# Altium PCB HSD_Eval_Board.PcbDoc
Units mm, origin at the board's own origin, x right, y up, seen from the top; angles counter-clockwise.
Board outline 57.2 x 36.96 mm, 2 copper layers (Top Layer, Bottom Layer); 30 components, 24 nets, 91 pads, 28 vias.
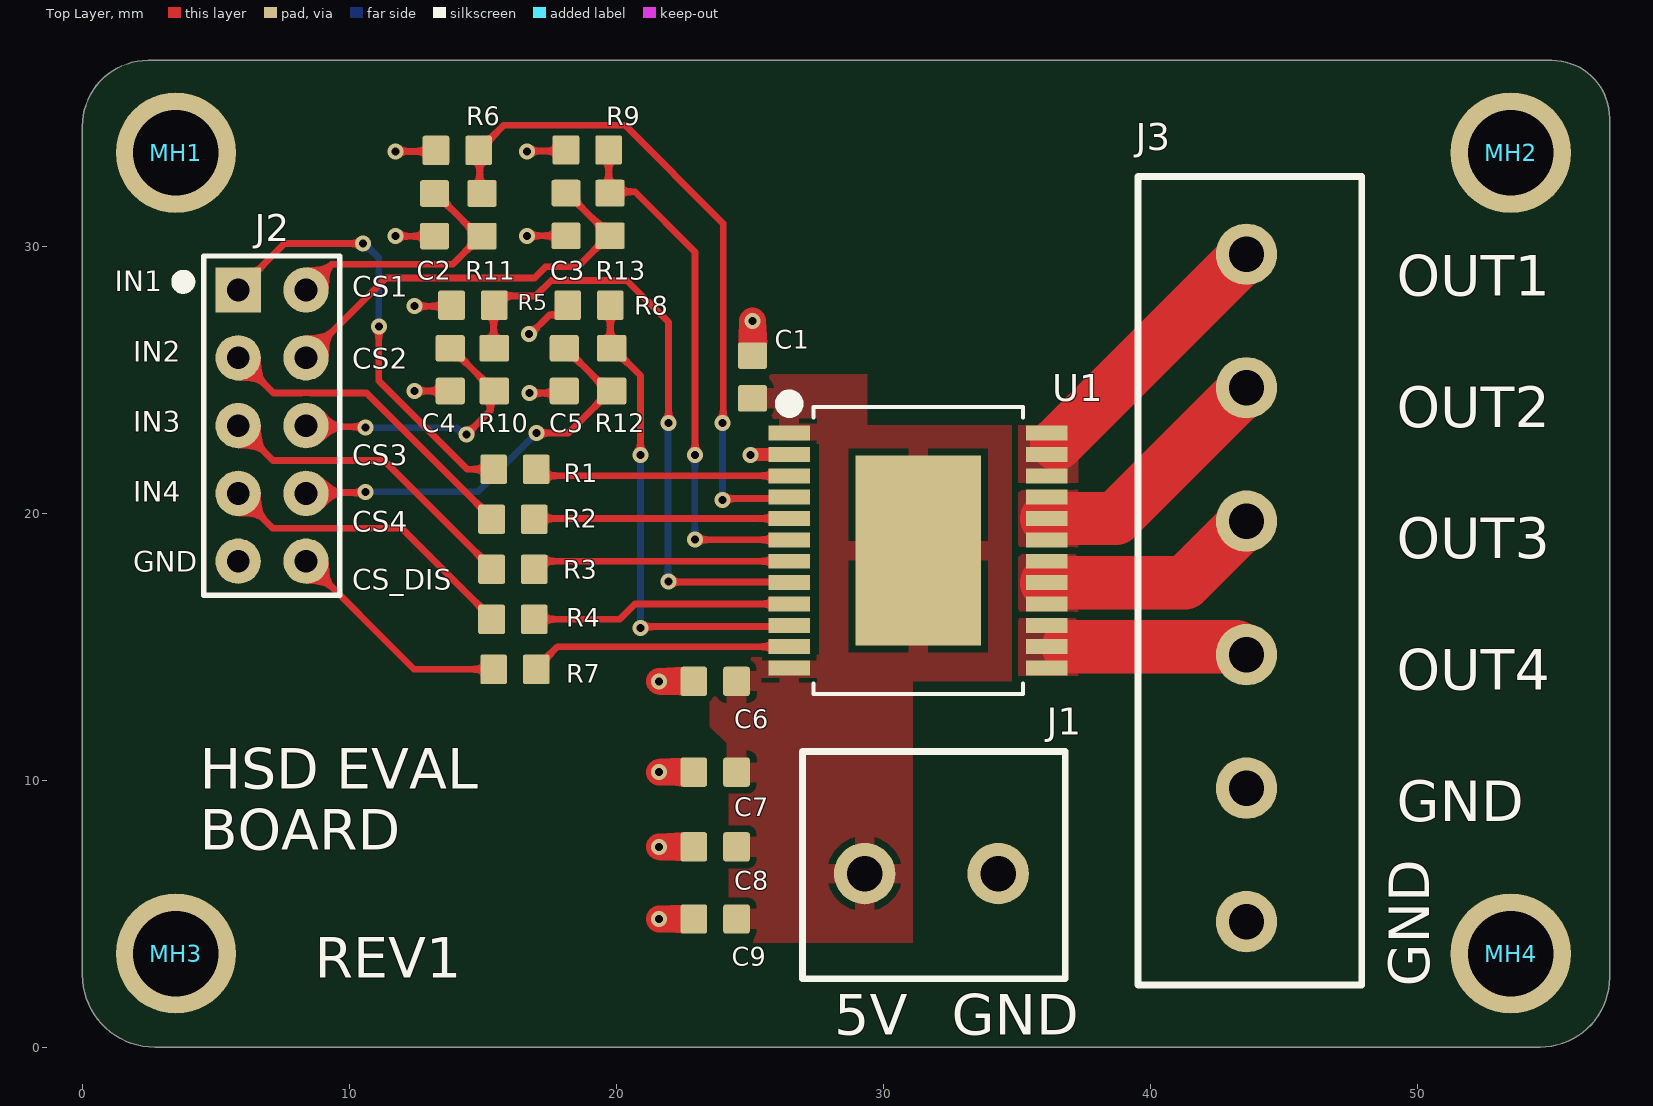
[diagram p0: Top Layer view]
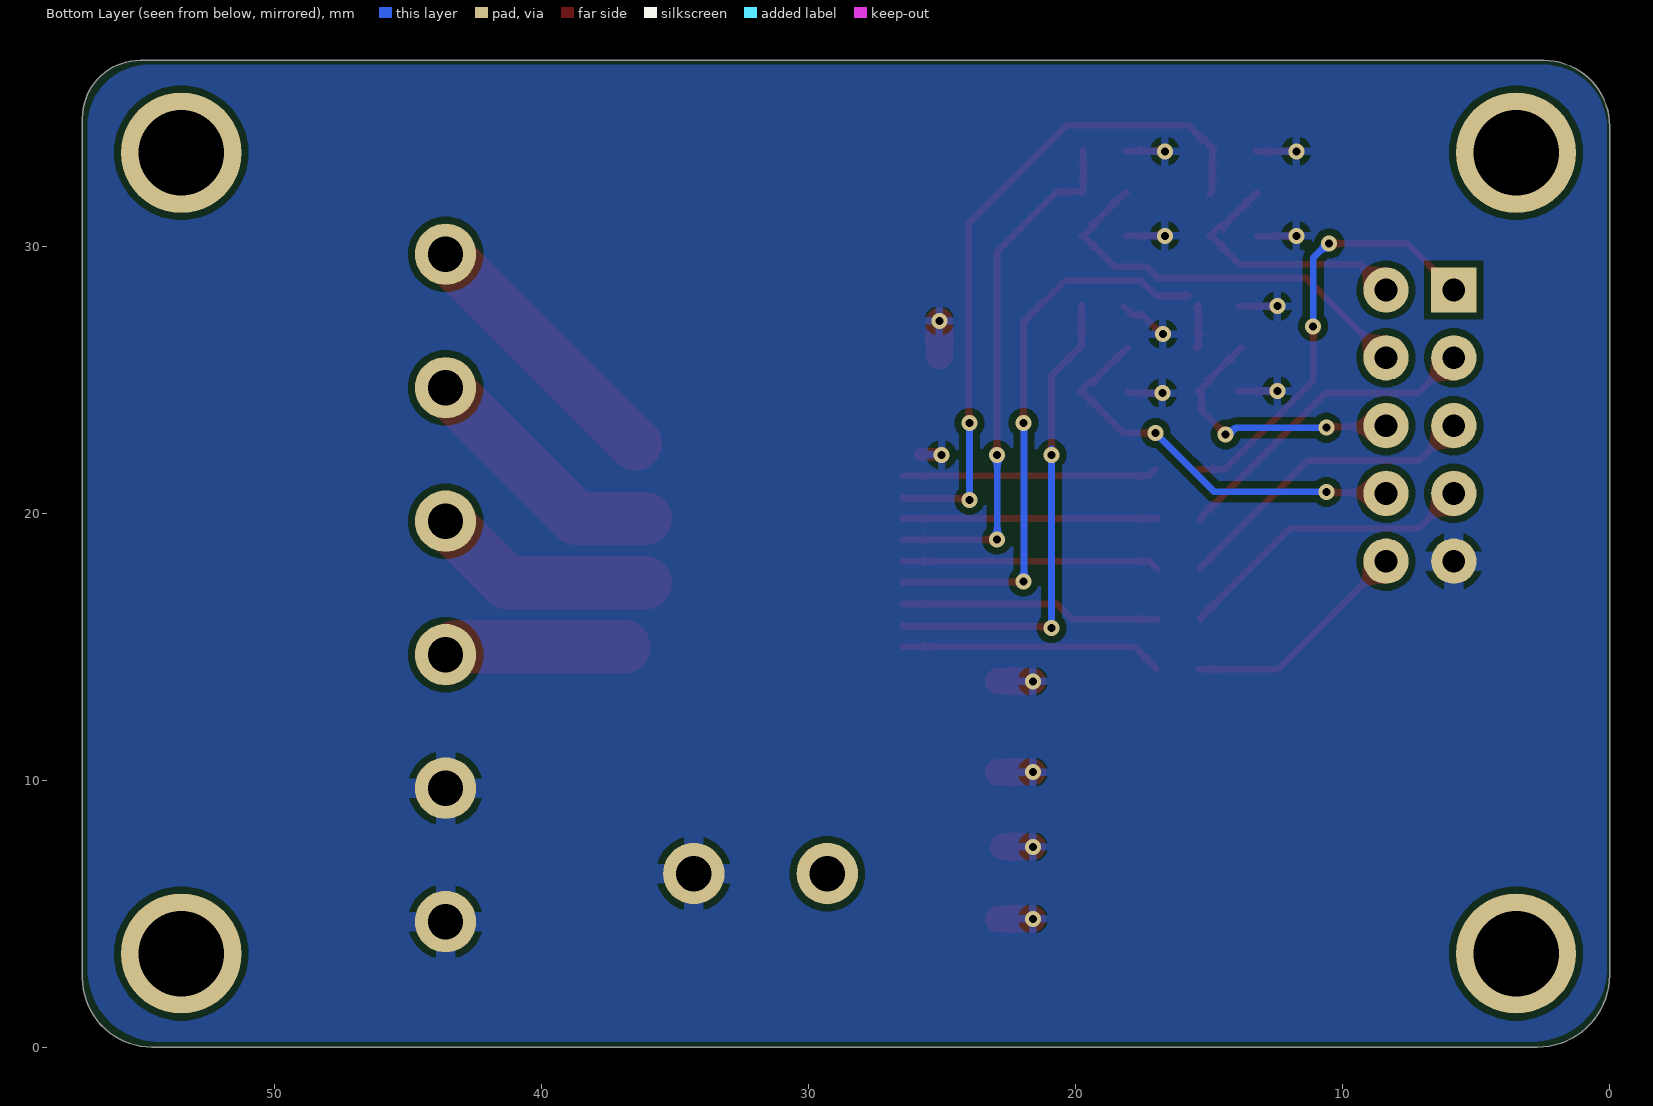
[diagram p1: Bottom Layer view, seen from below]
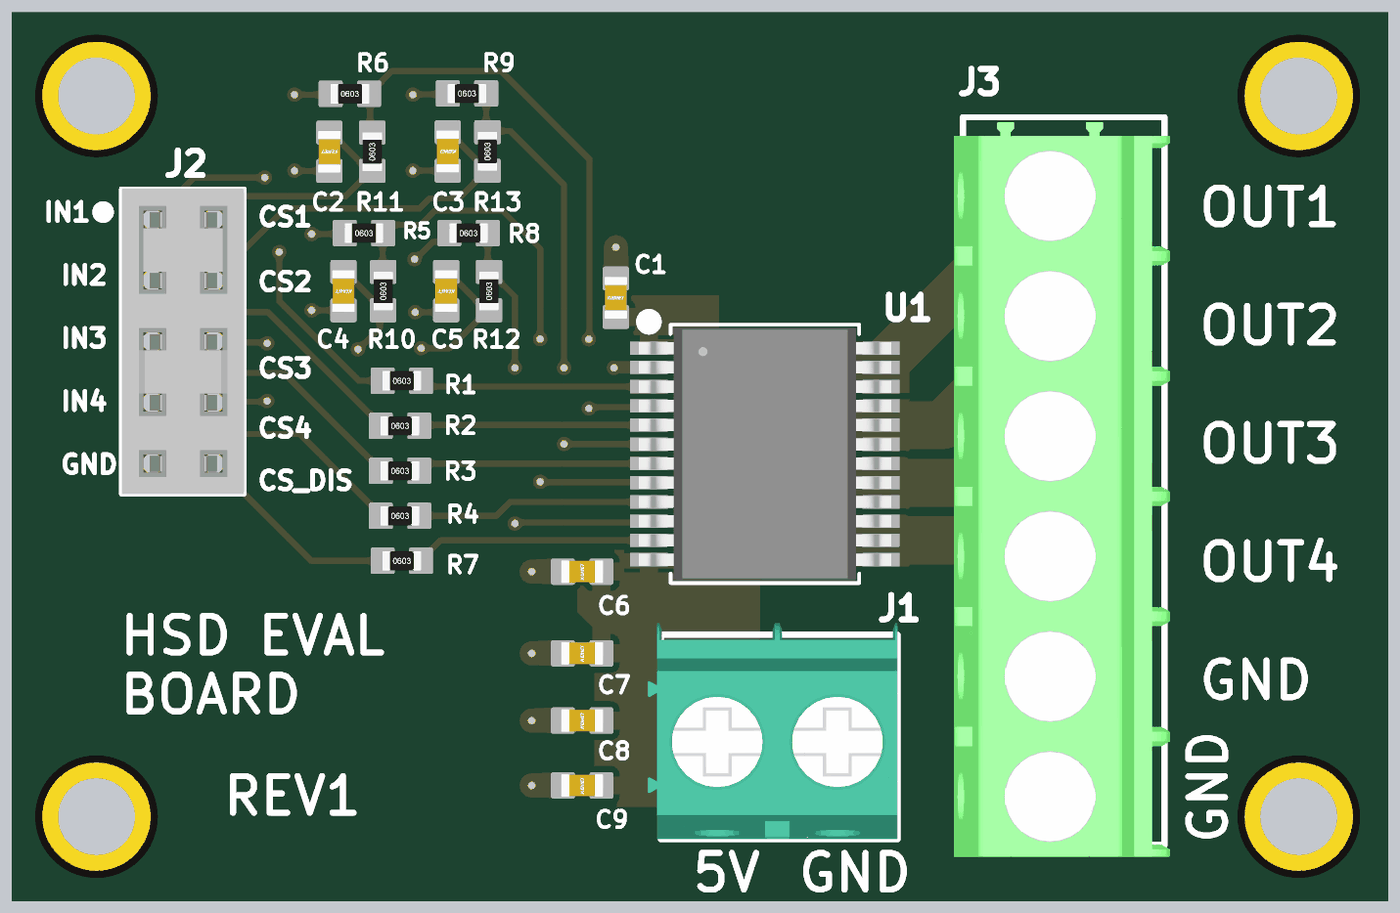
[diagram p2: 3D render of the assembled board from above, using the file's embedded part models]

## Layer stack, top to bottom
Top Solder: solder mask 0.0102, Solder Resist, Dk 3.5
Top Layer: signal copper 0.0356
Dielectric 1: dielectric 0.32, FR-4, Dk 4.8
Bottom Layer: signal copper 0.0356
Bottom Solder: solder mask 0.0102, Solder Resist, Dk 3.5

## Board outline
2.7,0 54.6,0 ccw(c54.6,2.6) 57.2,2.6 57.2,34.8 ccw(c55.043,34.8) 55.043,36.957 2.457,36.957 ccw(c2.457,34.5) 0,34.5 0,2.7 ccw(c2.7,2.7)

## Design rules (kind name [scope] priority, off if disabled: settings)
Clearance [All] p1: gap=0.254 ignorepadtopadclearanceinfootprint=TRUE except(0: Arc-Hole Track-Hole SMDPad-Hole THPad-Hole Via-Hole Fill-Hole Poly-Hole Region-Hole Text-Hole)
HoleSize [All] p1: absolutevalues=TRUE maxlimit=3.5 minlimit=0.025 maxpercent=80.000 minpercent=20.000
MinimumSolderMaskSliver [All] p1: minsoldermaskwidth=0.24
PlaneConnect [All] p1: planeconnectstyle=Direct reliefexpansion=0.508 reliefentries=4 reliefconductorwidth=0.254 reliefairgap=0.254
PolygonConnect "5V and Gnd Polygon" [InNet('5V0') or InNet('GND')] p1: thpad.connectstyle=Relief thpad.reliefconductorwidth=0.75 thpad.reliefentries=4 thpad.polygonreliefangle="90 Angle" thpad.airgapwidth=0.254 smdpad.connectstyle=Relief smdpad.reliefconductorwidth=0.75 smdpad.reliefentries=4 smdpad.polygonreliefangle="90 Angle" smdpad.airgapwidth=0.254 via.connectstyle=Relief via.reliefconductorwidth=0.3 via.reliefentries=4 via.polygonreliefangle="90 Angle" via.airgapwidth=0.254 // Want Thermal Reliefs
PolygonConnect [All] p2: connectstyle=Direct reliefconductorwidth=0.45 reliefentries=4 polygonreliefangle="90 Angle" airgapwidth=0.254
RoutingVias [All] p1: holewidth=0.711 width=1.27 viastyle="Through Hole" minholewidth=0.711 minwidth=1.27 maxholewidth=0.711 maxwidth=1.27
SolderMaskExpansion [All] p1: expansion=0.102 istentingtop=TRUE
Width [All] p1: maxlimit=3 minlimit=0.254 preferedwidth=0.254
27 further rules are at their usual default settings.

## Components (designator, comment, footprint, x,y, rotation, side; value= is the part's Value field where it differs from the comment)
C1 "CAP_0.01uF_100V_0603" CAP0603 25.1,25.1 r270 top value=0.01μF
C2 "CAP_0.01uF_100V_0603" CAP0603 13.188,31.176 r90 top value=0.01μF
C3 "CAP_0.01uF_100V_0603" CAP0603 18.11,31.189 r90 top value=0.01μF
C4 "CAP_0.01uF_100V_0603" CAP0603 13.773,25.376 r90 top value=0.01μF
C5 "CAP_0.01uF_100V_0603" CAP0603 18.046,25.376 r90 top value=0.01μF
C6 "CAP_0.01uF_100V_0603" CAP0603 23.7,13.7 r0 top value=0.01μF
C7 "CAP_10uF_10V_0603" CAP0603 23.7,10.3 r0 top value=10μF
C8 "CAP_10uF_10V_0603" CAP0603 23.7,7.5 r0 top value=10μF
C9 "CAP_10uF_10V_0603" CAP0603 23.7,4.8 r0 top value=10μF
J1 "CON_2M_TERM" 1935161 31.8,6.5 r180 top
J2 "HEADER 5x2" "HEADER 2X5" 7.103,23.28 r0 top
J3 "CON_6POS_SCREW_TERM" 1935200 43.6,29.7 r270 top
MH1 "MOUNTING_HOLE_M3" MOUNTING_HOLE_3mm#1 3.1,33.7 r0 top
MH2 "MOUNTING_HOLE_M3" MOUNTING_HOLE_3mm#2 52,33.5 r0 top
MH3 "MOUNTING_HOLE_M3" MOUNTING_HOLE_3mm#3 3.3,2.9 r0 top
MH4 "MOUNTING_HOLE_M3" MOUNTING_HOLE_3mm#4 53.1,3 r0 top
R1 "RES_10kΩ_0603_5%" RESC0603 15.4,21.643 r0 top value=10kΩ
R2 "RES_10kΩ_0603_5%" RESC0603 15.324,19.77 r0 top value=10kΩ
R3 "RES_10kΩ_0603_5%" RESC0603 15.324,17.897 r0 top value=10kΩ
R4 "RES_10kΩ_0603_5%" RESC0603 15.324,16.023 r0 top value=10kΩ
R5 "RES_10kΩ_0603_5%" RESC0603 14.966,30.376 r90 top value=10kΩ
R6 "RES_220Ω_0603" RESC0603 13.239,33.589 r0 top value=220Ω
R7 "RES_10kΩ_0603_5%" RESC0603 15.4,14.15 r0 top value=10kΩ
R8 "RES_10kΩ_0603_5%" RESC0603 19.761,30.389 r90 top value=10kΩ
R9 "RES_220Ω_0603" RESC0603 18.11,33.602 r0 top value=220Ω
R10 "RES_10kΩ_0603_5%" RESC0603 15.424,24.576 r90 top value=10kΩ
R11 "RES_220Ω_0603" RESC0603 13.824,27.789 r0 top value=220Ω
R12 "RES_10kΩ_0603_5%" RESC0603 19.824,24.576 r90 top value=10kΩ
R13 "RES_220Ω_0603" RESC0603 18.173,27.789 r0 top value=220Ω
U1 "VNQ5E160AK-E" PowerSSO-24_STM 31.3,18.6 r0 top

## Footprints (in the part's own frame and the unit in brackets; to place one, negate y for a bottom-side part, rotate by r counter-clockwise, add the part's x,y. Pads: shape width x height; smd on the part's side, far side on the other; paste and mask are expansions set on the pad)
1935161 [mm] "TERM BLK 2POS SIDE ENTRY 5MM PCB"
  round 2.3 hole 1.325: 1(-2.5,0) 2(2.5,0)
  silkscreen extent -5.01,-4.57 4.83,3.94, body extent -5.01,-5.06 5.39,3.94, height 11.41
1935200 [mm]
  round 2.3 hole 1.325: 1(0,0) 2(5,0) 3(10,0) 4(15,0) 5(20,0) 6(25,0)
  silkscreen extent -2.91,-4.06 27.37,4.32, body extent -2.71,-4.45 27.86,4.55, height 11.41
CAP0603 [mm]
  rrect20% 1x1.1 smd: 1(-0.8,0) 2(0.8,0)
  body extent -0.87,-0.48 0.88,0.48, height 0.87
"HEADER 2X5" [mm] "CONN HEADER VERT 10POS 2.54MM"
  rect 1.7x1.7 hole 0.85: 1(-1.27,5.08)
  round 1.7 hole 0.85: 2(-1.27,2.54) 3(-1.27,0) 4(-1.27,-2.54) 5(-1.27,-5.08) 6(1.27,5.08) 7(1.27,2.54) 8(1.27,0) 9(1.27,-2.54) 10(1.27,-5.08)
  silkscreen extent -3.53,-6.35 2.54,6.35, body extent -2.54,-6.35 2.54,6.35, height 8.51
MOUNTING_HOLE_3mm#1 [mm] "3mm Hole"
  round 4.5 hole 3.2 mask+0.3: 0(0.4,-0.2)
MOUNTING_HOLE_3mm#2 [mm] "3mm Hole"
  round 4.5 hole 3.2 mask+0.3: 0(1.5,0)
MOUNTING_HOLE_3mm#3 [mm] "3mm Hole"
  round 4.5 hole 3.2 mask+0.3: 0(0.2,0.6)
MOUNTING_HOLE_3mm#4 [mm] "3mm Hole"
  round 4.5 hole 3.2 mask+0.3: 0(0.4,0.5)
PowerSSO-24_STM [mil] "Power Switch/Driver 1:1 N-Channel 13.5A PowerSSO-24"
  rect 61x22 smd paste+0 mask+0: 1(-190,173.23) 2(-190,141.73) 3(-190,110.24) 4(-190,78.74) 5(-190,47.24) 6(-190,15.75) 7(-190,-15.75) 8(-190,-47.24) 9(-190,-78.74) 10(-190,-110.24) 11(-190,-141.73) 12(-190,-173.23) 13(190,-173.23) 14(190,-141.73) 15(190,-110.24) 16(190,-78.74) 17(190,-47.24) 18(190,-15.75) 19(190,15.75) 20(190,47.24) 21(190,78.74) 22(190,110.24) 23(190,141.73) 24(190,173.23)
  rect 185x280 smd paste-139.5 mask+0: EPAD(0,0)
  silkscreen extent -200,-212 154,226, body extent -207,-206 207,207, height 96
RESC0603 [mm] "Chip Resistor, Body 1.6x0.8mm, IPC Medium Density"
  rrect15% 1x1.1 smd: 1(0,0) 2(1.6,0)
  body extent 0,-0.4 1.6,0.4, height 0.46

## Part data
C1 C2 C3 C4 C5 C6: "CAP CER 10000PF 100V X7R 0603", Dielectric=X7R, Manufacturer 1="Murata Electronics", Manufacturer Part Number 1=GCM188R72A103KA37J, Supplier Part Number 1=490-8028-1-ND, Voltage Rating=100V, Supplier 1=Digi-Key
C7 C8 C9: "CAP CER 10UF 10V X5R 0603", Dielectric=X5R, Manufacturer 1=Yageo, Manufacturer Part Number 1=CC0603MRX5R6BB106, Supplier Part Number 1=311-1817-1-ND, Voltage Rating=10V, Supplier 1=Digi-Key
J1: "TERM BLK 2POS SIDE ENTRY 5MM", Current=18A, Manufacturer 1="Phoenix Contact", Manufacturer Part Number 1=1935161, Max Current Rating=16A, Package/Footprint=SMD, Supplier Part Number 1=277-1667-ND, Voltage=300V, Mounting Type=TH, Supplier 1=Digi-Key
J2: "CONN HEADER VERT 10POS 2.54MM", Color=Black, Manufacturer 1=Molex, Manufacturer Part Number 1=0901512210, Max Operating Temperature=125°C, Min Operating Temperature=-55°C, Supplier Part Number 1=WM4240-ND, Category="Headers and Wire Housings", ComponentLink1Description=https://datasheet.ciiva.com/755/901512210-sd-755814.pdf?src-supplier=Digi-Key, ComponentLink1URL=https://datasheet.ciiva.com/755/901512210-sd-755814.pdf?src-supplier=Digi-Key, Connector Type=Receptacle, Contact Material=Bronze, Contact Plating=Gold, Contact Type="Female Socket", Depth=5.08mm, Housing Color=Black, Housing Material=Polyester, Length=12.7mm, Mount="Through Hole", Number of Contacts=10, Number of Positions=10, Number of Rows=2, Orientation=Straight, Packaging=Rail/Tube, Pitch=0.1inch, RoHS Compliant=Yes, Row Spacing=0.1inch, Series="C-Grid III™ 90151", Stock 1=3613, Supplier 1=Digi-Key, Termination=Solder, Verified=No
J3: "TERM BLK 6POS SIDE ENTRY 5MM", Manufacturer 1="Phoenix Contact", Manufacturer Part Number 1=1935200, Package/Footprint=TH, Supplier Part Number 1=277-1581-ND, Mounting Type=TH, Pitch=5mm, Screw Thread=M2.6, Supplier 1=Digi-Key, Wire Gauge=12-26AWG
R1 R2 R3 R4 R5 R7 R8 R10 R12: "RES 10K OHM 5% 1/10W 0603", Manufacturer 1=Yageo, Manufacturer Part Number 1=RC0603JR-0710KL, Package/Footprint=0603, Supplier Part Number 1=311-10KGRCT-ND, Mounting Type=SMD, Supplier 1=Digi-Key
R6 R9 R11 R13: library part RES_220Ω_0603_5%, "RES 220 OHM 5% 1/10W 0603", Manufacturer 1=Yageo, Manufacturer Part Number 1=AC0603JR-07220RL, Supplier Part Number 1=YAG3652CT-ND, Supplier 1=Digi-Key
U1: "Power Switch/Driver 1:1 N-Channel 7A PowerSSO-24", Load Voltage="4.5V ~ 28V", Manufacturer 1=STMicroelectronics, Max Operating Temperature=150°C, Max Output Current=10A, Min Operating Temperature=-40°C, On-State Resistance=160mR, Output Current per Channel=7A, Supplier Part Number 1=497-19256-ND, Category="Hot Swap Controllers", ComponentLink1Description=https://datasheet.ciiva.com/1956/cd00163285-1956669.pdf?src-supplier=Digi-Key, ComponentLink1URL=https://datasheet.ciiva.com/1956/cd00163285-1956669.pdf?src-supplier=Digi-Key, Lead Free="Lead Free", Manufacturer Part Number 1=VNQ5E160AK-E, Mounting Type=SM, Number of Outputs=4, Number of Pins=24, Output Configuration="High Side", Rds On (Typ)="160mOhm (Max)", Series=VIPower™, Supplier 1=Digi-Key, Verified=No

## Via types
v1: diameter 0.6, hole 0.3, Top Layer to Bottom Layer, tented both sides, 28 vias

## Nets (pads, with @x,y where several pads share a name; then routed paths per layer and width w, separated by ;. In a path a pad name is that pad's centre, name@x,y a point inside that pad or via, vN(x,y) a via of type N, cw(c..) or ccw(c..) an arc to the next point about the centre after c; other vN are vias at no path point)
5V0: C1.2 C6.2 C7.2 C8.2 C9.2 J1.2 U1.1 U1.12 U1.EPAD
GND: C1.1 C2.1 C3.1 C4.1 C5.1 C6.1 C7.1 C8.1 C9.1 J1.1 J2.5 J3.5 J3.6 R6.1 R9.1 R11.1 R13.1 U1.2 | length 19.1
  Top Layer w0.254: v1@11.734,30.376 C2.1 ; v1(11.734,33.551) R6.1@13.188,33.551 ; v1(12.446,24.576) C4.1 C4.1@13.9,24.576 ; v1(12.446,27.751) R11.1@13.9,27.751 ; R6.1@13.188,33.538 R6.1 ; v1(16.656,30.389) C3.1 ; v1@16.656,33.564 R9.1@18.11,33.564 ; v1(16.752,24.498) 17.968,24.498 C5.1 ; v1@16.755,26.683 17.498,27.427 17.861,27.427 R13.1@18.185,27.751 ; v1(25.022,22.182) v1@25.04,22.2
  Top Layer w0.5: v1@25.04,22.2 U1.2@25.8,22.2
  Top Layer w1: v1(21.6,4.8) C9.1 ; v1(21.6,7.5) C8.1@22.7,7.5 ; v1(21.6,10.3) C7.1 ; v1(21.6,13.7) C6.1 ; C1.1 v1(25.1,27.2)
  other v1: 16.729,26.706 11.734,30.389 16.656,33.551
HSD_CS1: C2.2 J2.6 R5.1 | length 9.9
  Top Layer w0.254: J2.6 9.333,29.32 13.86,29.32 14.916,30.376 R5.1 14.593,30.749 14.465,30.749 13.238,31.976 C2.2
HSD_CS2: C3.2 J2.7 R8.1 | length 15.6
  Top Layer w0.254: J2.7 11.365,28.812 16.933,28.812 17.349,29.228 18.549,29.228 R8.1@19.711,30.389 ; C3.2 18.16,31.989 19.338,30.811 19.338,30.762 R8.1@19.711,30.389 ; R8.1 R8.1@19.711,30.389
HSD_CS3: C4.2 J2.8 R10.1 | length 10.5
  Top Layer w0.254: J2.8 8.413,23.24 10.56,23.24 v1(10.6,23.2) ; C4.2 13.823,26.176 15.001,24.998 15.001,24.949 R10.1@15.374,24.576 ; v1@14.466,23.029 15.281,23.844 15.281,24.483 R10.1@15.374,24.576 ; R10.1 R10.1@15.374,24.576
  Bottom Layer w0.254: v1@10.592,23.2 v1(10.6,23.2) 14,23.2 v1@14.4,22.8
  other v1: 14.376,22.951
HSD_CS4: C5.2 J2.9 R12.1 | length 15.5
  Top Layer w0.254: J2.9 8.403,20.77 10.57,20.77 v1(10.6,20.8) ; v1(17,23) 18.198,23 19.774,24.576 R12.1 19.451,24.949 19.323,24.949 18.096,26.176 C5.2
  Bottom Layer w0.254: v1(10.6,20.8) 14.8,20.8 v1(17,23)
HSD_CS_DIS: J2.10 R7.1 | length 8.7
  Top Layer w0.254: J2.10 12.42,14.153 15.397,14.153 R7.1
HSD_IN1: J2.1 R1.1 | length 16.5
  Top Layer w0.254: J2.1 7.573,30.1 v1(10.5,30.1) ; v1(11.1,27) 11.1,24.959 14.416,21.643 R1.1
  Bottom Layer w0.254: v1(10.5,30.1) 10.557,30.1 11.1,29.557 v1(11.1,27)
HSD_IN2: J2.2 R2.1 | length 12
  Top Layer w0.254: J2.2 7.079,24.574 7.153,24.5 8.209,24.5 cw(c8.373,23.28) 8.537,24.5 10.644,24.5 10.718,24.426 15.324,19.82 R2.1
HSD_IN3: J2.3 R3.1 | length 11.8
  Top Layer w0.254: J2.3 7.142,21.971 11.3,21.971 15.324,17.947 R3.1
HSD_IN4: J2.4 R4.1 | length 11.5
  Top Layer w0.254: J2.4 7.142,19.431 11.966,19.431 15.324,16.073 R4.1
HSD_OUT1: J3.1 U1.22 U1.23 U1.24 | length 10.9
  Top Layer w0.254: U1.23 U1.23@36.621,22.2 ; J3.1@43.6,29.179 J3.1
  Top Layer w2: 36.5,22.6 J3.1@43.479,29.579
HSD_OUT2: J3.2 U1.19 U1.20 U1.21 | length 9.5
  Top Layer w2: U1.20 38.7,19.8 J3.2
HSD_OUT3: J3.3 U1.16 U1.17 U1.18 | length 8.4
  Top Layer w2: U1.17 41.3,17.4 J3.3
HSD_OUT4: J3.4 U1.13 U1.14 U1.15 | length 7
  Top Layer w0.254: U1.14 U1.14@36.266,14.86
  Top Layer w2: 36.926,15 43.219,15 43.519,14.7 J3.4
NetR1_2: R1.2 U1.3 | length 9.6
  Top Layer w0.254: R1.2 17.243,21.4 U1.3
NetR2_2: R2.2 U1.5 | length 9.6
  Top Layer w0.254: R2.2 16.954,19.8 U1.5
NetR3_2: R3.2 U1.7 | length 9.7
  Top Layer w0.254: R3.2 R3.2@17.224,18.197 ; R3.2@17.224,18.2 U1.7
NetR4_2: R4.2 U1.9 | length 9.8
  Top Layer w0.254: R4.2 20.123,16.023 20.7,16.6 U1.9
NetR5_2: R5.2 R6.2 U1.4 | length 25.7
  Top Layer w0.254: R5.2 14.878,32.064 14.878,33.55 R6.2 14.839,33.639 15.212,34.012 15.262,34.012 15.783,34.533 20.323,34.533 24,30.857 24,23.402 v1(23.975,23.377) ; v1(23.975,20.495) 24.027,20.547 26.421,20.547 U1.4
  Bottom Layer w0.254: v1@23.959,23.351 23.975,23.336 v1(23.975,20.495)
NetR7_2: R7.2 U1.11 | length 9.9
  Top Layer w0.254: R7.2 17,14.2 17.8,15 U1.11
NetR8_2: R8.2 R9.2 U1.6 | length 20.1
  Top Layer w0.254: R9.2 R8.2@19.71,32.04 ; R8.2 R8.2@19.71,32.04 ; v1@22.92,19.012 22.926,19.006 26.468,19.006 U1.6 ; v1@22.945,22.271 22.945,29.787 20.692,32.04 R8.2@19.71,32.04
  Bottom Layer w0.254: v1@22.92,19.012 22.932,19.025 22.932,22.258 v1@22.945,22.271
  other v1: 22.945,19.012 22.945,22.182
NetR10_2: R10.2 R11.2 U1.8 | length 23.1
  Top Layer w0.254: R10.2@15.4,26.2 R11.2@15.4,27.661 ; R10.2 R10.2@15.5,26.252 ; R11.2 R11.2@15.5,27.713 ; R11.2@15.772,28.148 15.783,28.137 16.976,28.137 17.559,28.72 20.387,28.72 21.952,27.155 v1(21.952,23.382) ; v1@21.912,17.439 21.931,17.419 26.455,17.419 U1.8
  Bottom Layer w0.254: v1@21.912,17.439 21.932,17.459 21.932,23.362 v1(21.952,23.382)
  other v1: 21.952,17.439
NetR12_2: R12.2 R13.2 U1.10 | length 18.2
  Top Layer w0.254: R13.2@19.774,27.788 19.774,26.227 R12.2 ; R12.2@19.849,26.201 20.9,25.15 20.9,23.088 v1@20.9,22.4 ; v1(20.9,15.7) 20.95,15.75 26.424,15.75 U1.10
  Bottom Layer w0.254: v1(20.9,15.7) v1@20.9,22.4
  other v1: 20.9,22.182
pads on no net: MH1.0 MH2.0 MH3.0 MH4.0

## Polygon pours and split planes (outlines as drawn)
5V0 on Top Layer "5V - TOP LAYER" (solid, remove dead copper, pour order 0): 31.1,3.9 31.1,13.7 34.8,13.7 34.8,23.3 29.4,23.3 29.4,25.2 24.2,25.2 24.2,22.6 25.6,22.6 27.6,22.6 27.6,14.7 23.5,14.7 23.5,12 24.2,11.3 24.2,3.9
HSD_OUT4 on Top Layer "HSD_OUT4" (solid, remove dead copper, pour order 9): 35.005,13.916 35.005,16.075 37.305,16.075 37.305,13.916
HSD_OUT3 on Top Layer "HSD_OUT3" (solid, remove dead copper, pour order 8): 35.005,16.316 35.005,18.475 37.305,18.475 37.305,16.316
HSD_OUT2 on Top Layer "HSD_OUT2" (solid, remove dead copper, pour order 7): 35.005,18.716 35.005,20.875 37.305,20.875 37.305,18.716
HSD_OUT1 on Top Layer "HSD_OUT1" (solid, remove dead copper, pour order 1): 35,21.142 35,23.3 37.3,23.3 37.3,21.142
GND on Bottom Layer "GND - TOP LAYER" (solid, remove dead copper, pour order 3): 2.5,36.8 54.7,36.8 cw(c54.7,34.504) 56.996,34.504 56.996,2.896 cw(c54.3,2.896) 54.3,0.2 2.9,0.2 cw(c2.9,3) 0.1,3 0.1,34.4 cw(c2.5,34.4)

## Silkscreen, mask and mechanical layers (free items; w line width, h text height)
Top Overlay:
  text "IN1" at 1.203,28.303 h0.76
  text "OUT1" at 49.228,28.148 h1.52
  text "CS1" at 10.103,28.103 h0.76
  text "IN2" at 1.903,25.678 h0.76
  text "CS2" at 10.103,25.403 h0.76
  text "OUT2" at 49.228,23.227 h1.52
  text "IN3" at 1.903,23.053 h0.76
  text "CS3" at 10.103,21.803 h0.76
  text "IN4" at 1.903,20.428 h0.76
  text "CS4" at 10.103,19.303 h0.76
  text "OUT3" at 49.228,18.306 h1.52
  text "GND" at 1.903,17.803 h0.76
  text "CS_DIS" at 10.103,17.13 h0.76
  text "OUT4" at 49.228,13.384 h1.52
  text "GND" at 49.228,8.463 h1.52
  text "HSD EVAL  / BOARD" at 4.4,7.4 h1.52
  text "REV1" at 8.7,2.6 h1.52
  text "GND" at 50.446,2.254 h1.52 r90
  text "5V" at 28.154,0.454 h1.52
  text "GND" at 32.554,0.454 h1.52

## Text inside footprints (layer, text, board x,y; h text height)
U1: Mechanical 13 "*" at 27.566,22.499 h1.27